# Altium PCB USB2514 PCB v2.PcbDoc
Units mm, origin at the board's own origin, x right, y up, seen from the top; angles counter-clockwise.
Board outline 44 x 44 mm, 2 copper layers (Top Layer, Bottom Layer); 61 components, 47 nets, 205 pads, 143 vias.
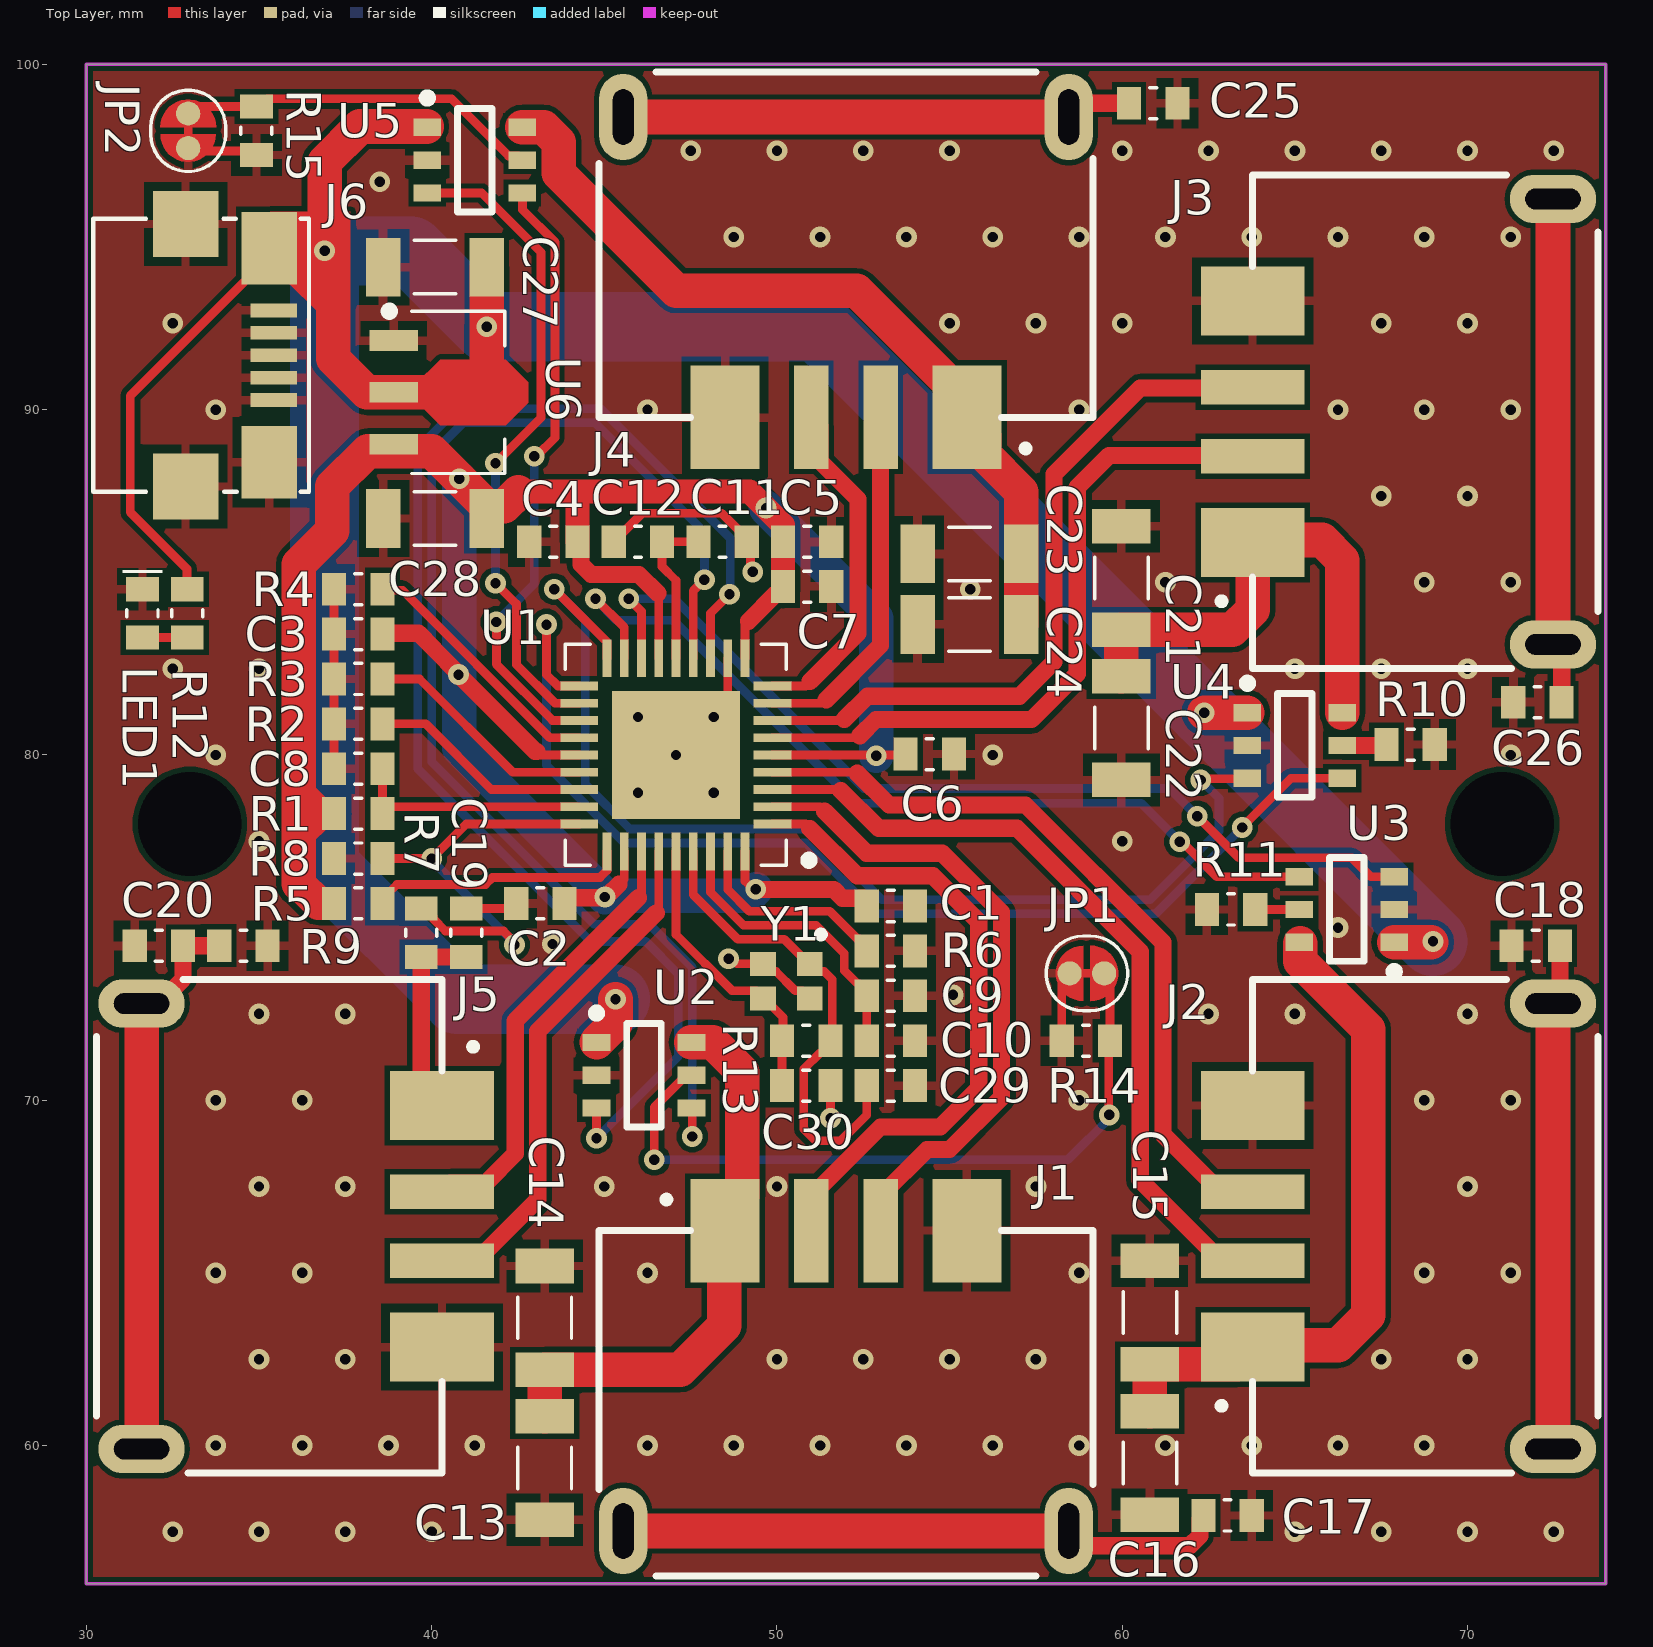
[diagram p0: Top Layer view]
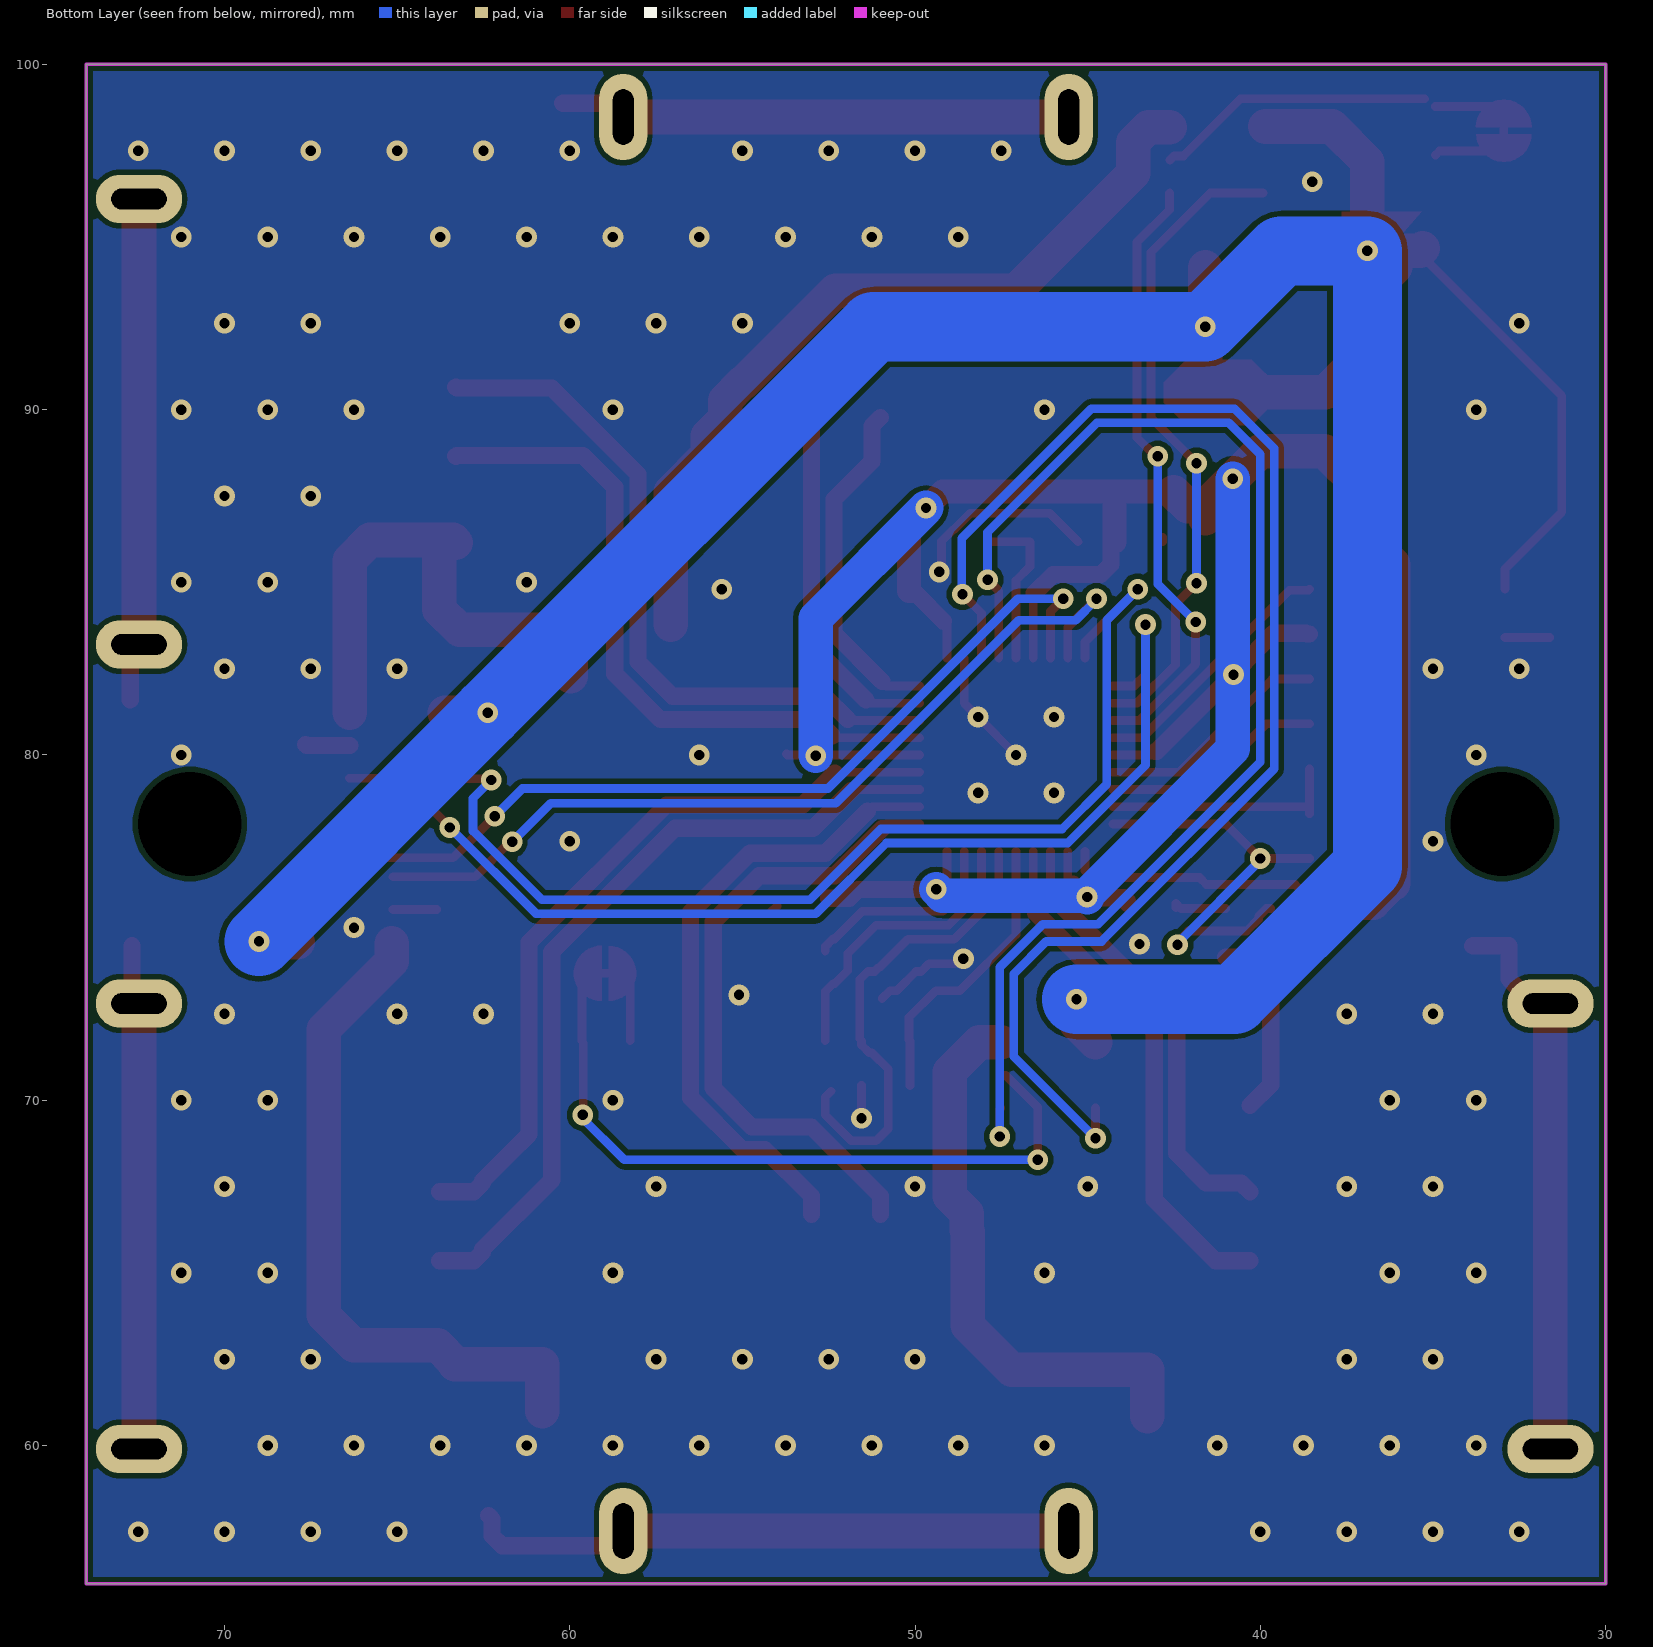
[diagram p1: Bottom Layer view, seen from below]
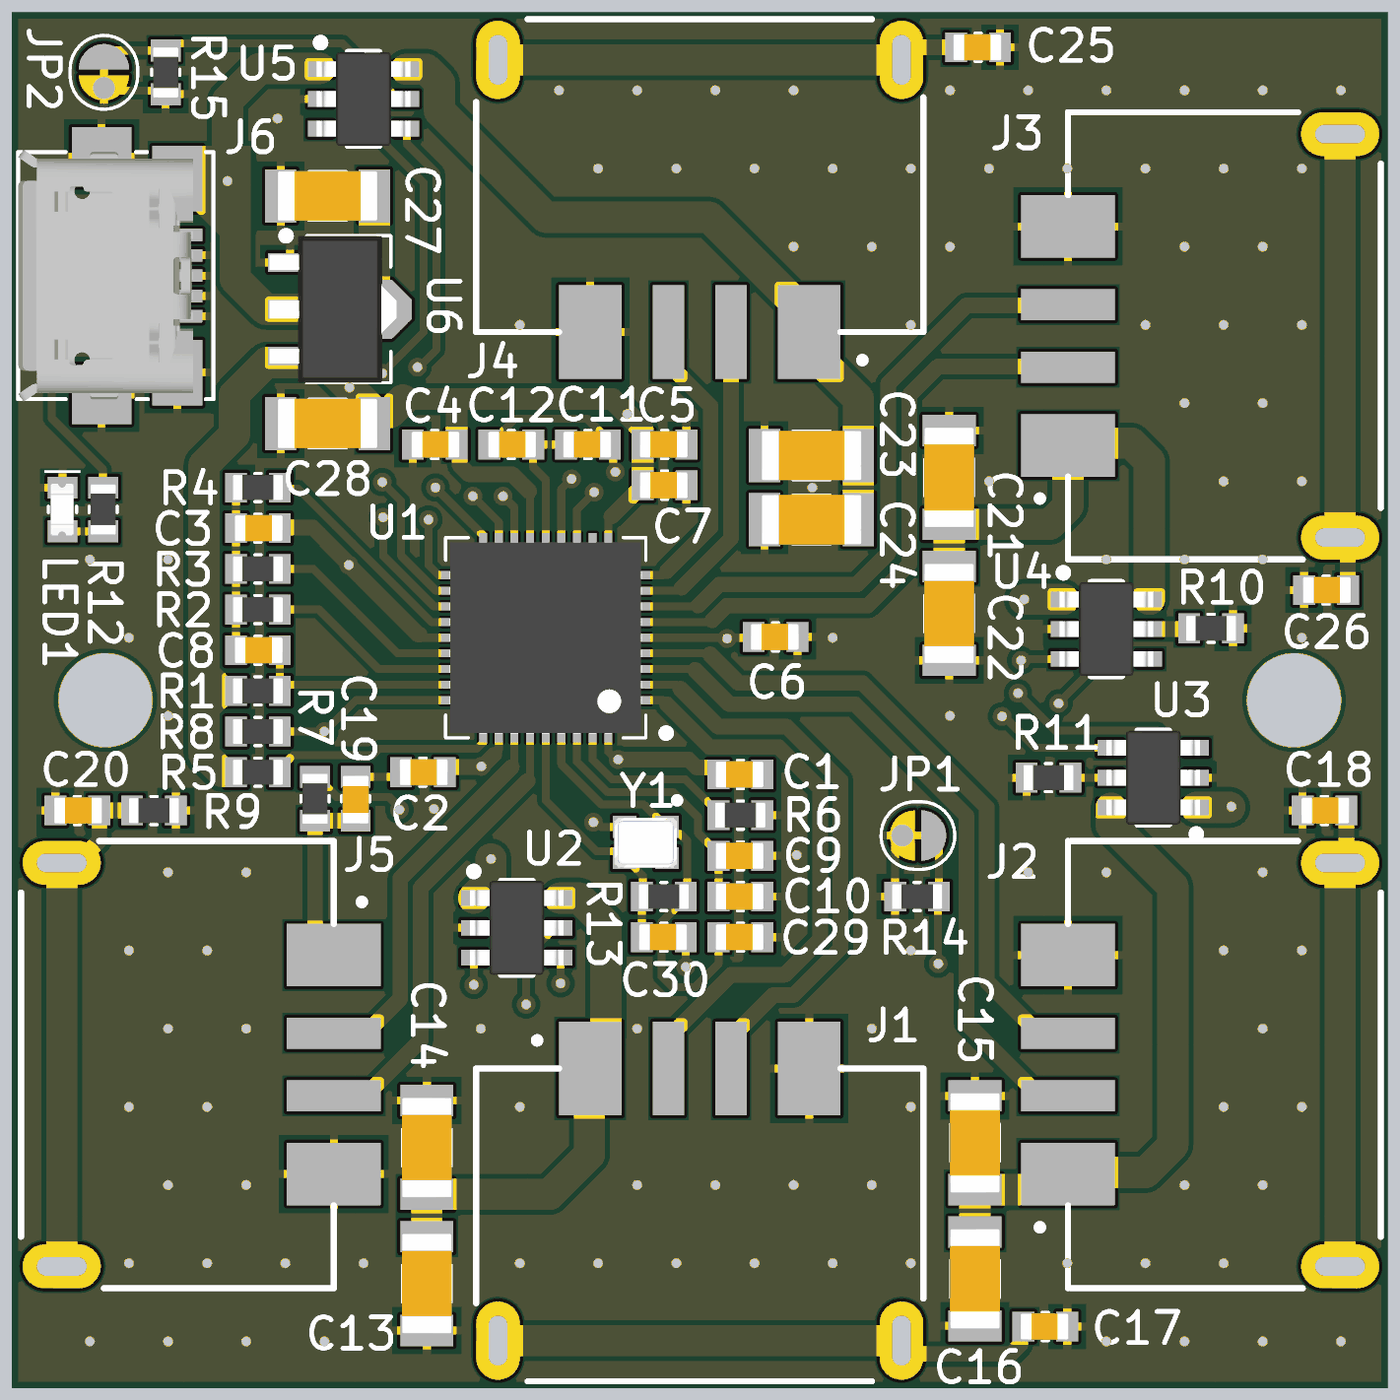
[diagram p2: 3D render of the assembled board from above, using the file's embedded part models]

## Layer stack, top to bottom
Top Solder: solder mask 0.0102, Solder Resist, Dk 3.5
Top Layer: signal copper 0.0356
Dielectric 1: dielectric 0.32, FR-4, Dk 4.8
Bottom Layer: signal copper 0.0356
Bottom Solder: solder mask 0.0102, Solder Resist, Dk 3.5

## Board outline
30,56 30,100 74,100 74,56

## Design rules (kind name [scope] priority, off if disabled: settings)
Clearance "Stitching GND" [IsStitchingVia and InNet('GND') vs (IsVia and (Not IsStitchingVia)) Or IsPad] p1: gap=0.127 ignorepadtopadclearanceinfootprint=FALSE
Clearance [All] p2: gap=0.152 ignorepadtopadclearanceinfootprint=FALSE
DiffPairsRouting [All] p1: maxlimit=0.254 minlimit=0.1 mostfreqgap=0.152 toplayer_minwidth=0.1 toplayer_maxwidth=1 toplayer_prefwidth=0.254 bottomlayer_minwidth=0.1 bottomlayer_maxwidth=1 bottomlayer_prefwidth=0.254 maxuncoupledlength=12.7
HoleSize [All] p1: absolutevalues=TRUE maxlimit=5 minlimit=0.025 maxpercent=80.000 minpercent=20.000
MinimumSolderMaskSliver [All] p1: minsoldermaskwidth=0
PolygonConnect [All] p1: connectstyle=Relief reliefconductorwidth=0.254 reliefentries=4 polygonreliefangle="90 Angle" airgapwidth=0.254
RoutingVias [All] p1: holewidth=0.3 width=0.6 viastyle="Through Hole" minholewidth=0.1 minwidth=0.1 maxholewidth=5 maxwidth=5
ShortCircuit [All] p1: allowed=TRUE
SilkToSilkClearance [All] p1: silktosilkclearance=0.1
SilkToSolderMaskClearance [IsPad] p1: minsilkscreentomaskgap=0 clearancetoexposedcopper=TRUE
SolderMaskExpansion [All] p1: expansion=0.102 istentingtop=FALSE
Width [All] p1: maxlimit=3 minlimit=0.254 preferedwidth=0.254 minimp=50.000000 maximp=50.000000 favimp=50.000000
24 further rules are at their usual default settings.

## Classes and differential pairs
component class "USB2514 USB PORTS": C13 C14 C15 C16 C17 C18 C19 C20 C21 C22 C23 C24 C25 C26 J1 J2 J3 J4 J5 R7 R8 R9
component class "USB2514 REGULATOR": C27 C28 J6 LED1 R12 U6
component class "USB2514 POWER DISTRIBUTION SWITCHES": JP1 JP2 R10 R11 R14 R15 U2 U3 U4 U5
component class "USB2514 MCU": C1 C2 C3 C4 C5 C6 C7 C8 C9 C10 C11 C12 R1 R2 R3 R4 R5 R6 U1
component class "USB2514 CRYSTAL": C29 C30 R13 Y1

## Components (designator, comment, footprint, x,y, rotation, side; value= is the part's Value field where it differs from the comment)
C1 "0.1uF" CAPC1608X06N-0603 53.3,75.625 r180 top
C2 "0.1uF" CAPC1608X06N-0603 43.15,75.7 r0 top
C3 "0.1uF" CAPC1608X06N-0603 37.875,83.5 r0 top
C4 "0.1uF" CAPC1608X06N-0603 43.525,86.175 r0 top
C5 "0.1uF" CAPC1608X06N-0603 50.875,86.175 r180 top
C6 "0.1uF" CAPC1608X06N-0603 54.425,80.025 r180 top
C7 "4.7uF 6.3V X5R" CAPC1608X06N-0603 50.875,84.875 r180 top
C8 "0.1uF" CAPC1608X06N-0603 37.875,79.6 r0 top
C9 "0.1uF" CAPC1608X06N-0603 53.3,73.025 r180 top
C10 "1uF 16V X5R" CAPC1608X06N-0603 53.3,71.725 r180 top
C11 "0.1uF" CAPC1608X06N-0603 48.425,86.175 r180 top
C12 "1uF 16V X5R" CAPC1608X06N-0603 45.975,86.175 r0 top
C13 "22uF" CAPC3216X10N-1206 43.275,59.35 r90 top
C14 "22uF" CAPC3216X10N-1206 43.275,63.7 r270 top
C15 "22uF" CAPC3216X10N-1206 60.8,63.85 r270 top
C16 "22uF" CAPC3216X10N-1206 60.8,59.5 r90 top
C17 "0.1uF" CAPC1608X06N-0603 63.05,57.975 r180 top
C18 "0.1uF" CAPC1608X06N-0603 71.975,74.475 r0 top
C19 "1uF 16V X5R" CAPC1608X06N-0603 41,74.85 r270 top
C20 "0.1uF" CAPC1608X06N-0603 32.1,74.475 r0 top
C21 "22uF" CAPC3216X10N-1206 59.975,85.125 r270 top
C22 "22uF" CAPC3216X10N-1206 59.975,80.775 r90 top
C23 "22uF" CAPC3216X10N-1206 55.575,85.825 r0 top
C24 "22uF" CAPC3216X10N-1206 55.575,83.775 r0 top
C25 "0.1uF" CAPC1608X06N-0603 60.9,98.875 r180 top
C26 "0.1uF" CAPC1608X06N-0603 72.025,81.525 r0 top
C27 "10uF" CAPC3216X10N-1206 40.1,94.125 r0 top
C28 "10uF" CAPC3216X10N-1206 40.1,86.85 r0 top
C29 "33pF" CAPC1608X06N-0603 53.3,70.425 r180 top
C30 "33pF" CAPC1608X06N-0603 50.85,70.425 r180 top
J1 "USB-A CONNECTOR" USB-U-A-24DS-Y-1 48.5,66.225 r0 top
J2 "USB-A CONNECTOR" USB-U-A-24DS-Y-1 63.775,62.85 r90 top
J3 "USB-A CONNECTOR" USB-U-A-24DS-Y-1 63.775,86.15 r90 top
J4 "USB-A CONNECTOR" USB-U-A-24DS-Y-1 55.5,89.775 r180 top
J5 "USB-A CONNECTOR" USB-U-A-24DS-Y-1 40.3,69.85 r270 top
J6 "MICRO USB2.0" USB_CON_10118192-0001LF_SMD 34.15,91.575 r270 top
JP1 "JUMP_N-C" "JUMP_N-C 0,254" 58.875,73.675 r0 top
JP2 "JUMP_N-C" "JUMP_N-C 0,254" 32.95,97.975 r90 top
LED1 "LED RED" LED_0603 31.625,83.4 r90 top
R1 "100K" RESC1608X06N-0603 37.875,78.3 r180 top
R2 "100K" RESC1608X06N-0603 37.875,80.9 r0 top
R3 "100K" RESC1608X06N-0603 37.875,82.2 r0 top
R4 "100K" RESC1608X06N-0603 37.875,84.8 r0 top
R5 "100K" RESC1608X06N-0603 37.875,75.7 r180 top
R6 "12K" RESC1608X06N-0603 53.3,74.325 r180 top
R7 "100K" RESC1608X06N-0603 39.7,74.85 r270 top
R8 "100K" RESC1608X06N-0603 37.875,77 r0 top
R9 "330" RESC1608X06N-0603 34.55,74.475 r180 top
R10 "390" RESC1608X06N-0603 68.35,80.3 r180 top
R11 "390" RESC1608X06N-0603 63.15,75.525 r0 top
R12 "1K" RESC1608X06N-0603 32.925,84.1 r90 top
R13 "1Meg" RESC1608X06N-0603 50.85,71.725 r180 top
R14 "000" RESC1608X06N-0603 58.95,71.725 r0 top
R15 "000" RESC1608X06N-0603 34.925,98.075 r90 top
U1 "USB2514BT/M2" QFN50P600X600X100_HS-37N 47.075,80 r180 top
U2 "MIC2019A-1YM6 TR" SOT95P280X90-6N 46.15,70.725 r0 top
U3 "MIC2019A-1YM6 TR" SOT95P280X90-6N 66.5,75.525 r180 top
U4 "MIC2019A-1YM6 TR" SOT95P280X90-6N 65,80.275 r0 top
U5 "MIC2019A-1YM6 TR" SOT95P280X90-6N 41.25,97.225 r0 top
U6 "HT7333-1" SOT89-150P350X150-3N 40.5,90.5 r0 top
Y1 "24 MHz 6 pf CRYSTAL" OSC_XRCGB24M000F2P00R0 50.275,73.45 r270 top

## Footprints (in the part's own frame and the unit in brackets; to place one, negate y for a bottom-side part, rotate by r counter-clockwise, add the part's x,y. Pads: shape width x height; smd on the part's side, far side on the other; paste and mask are expansions set on the pad)
CAPC1608X06N-0603 [mm] "Chip Capacitor, 2-Leads, Body 1,55x0,85mm, IPC Medium Density"
  rect 0.7x0.95 smd: 1(-0.7,0) 2(0.7,0)
  silkscreen extent -0.1,-0.45 0.1,0.45, body extent -0.75,-0.42 0.8,0.43, height 0.55
CAPC3216X10N-1206 [mm] "Chip Capacitor, 2-Leads, Body 3,20x1,60mm, IPC Medium Density"
  rect 1x1.7 smd: 1(-1.5,0) 2(1.5,0)
  silkscreen extent -0.6,-0.77 0.6,0.77, body extent -1.6,-0.8 1.6,0.8, height 1
"JUMP_N-C 0,254" [mm]
  round 0.7 smd mask+0: 1(-0.4,0) 2(0.6,0)
  Top Layer region: 0,-0.8 -0.347,-0.721 -0.625,-0.499 -0.78,-0.178 -0.78,0.178 -0.625,0.499 -0.347,0.721 0,0.8 0,0.8
  Top Layer region: 0.2,-0.806 0.2,0.806 0.55,0.726 0.83,0.503 0.986,0.179 0.986,-0.179 0.83,-0.503 0.55,-0.726 0.2,-0.806
  Top Layer lines w0.254: -0.4,0 0.6,0
  silkscreen extent -1.08,-1.08 1.28,1.08
LED_0603 [mm]
  rect 0.7x0.95 smd: A(0,0) C(1.4,0)
  silkscreen extent 0.6,-0.58 1.95,0.58, body extent -0.13,-0.35 1.53,0.38, height 0.68
OSC_XRCGB24M000F2P00R0 [mm]
  rect 0.7x0.75 smd: 1(-0.5,0.675) 2(-0.5,-0.675) 3(0.5,-0.675) 4(0.5,0.675)
  silkscreen extent -1.45,0.9 -1.25,1.1, body extent -0.8,-1 0.8,1, height 0.7
QFN50P600X600X100_HS-37N [mm] "QFN, 36-Leads, Body 6,00x6,00mm, Pitch 0,50mm, Thermal Pad 3,70x3,70mm, IPC Medium Density"
  rect 1.1x0.254 smd mask+0.076: 1(-2.8,2) 2(-2.8,1.5) 3(-2.8,1) 4(-2.8,0.5) 5(-2.8,0) 6(-2.8,-0.5) 7(-2.8,-1) 8(-2.8,-1.5) 9(-2.8,-2) 19(2.8,-2) 20(2.8,-1.5) 21(2.8,-1) 22(2.8,-0.5) 23(2.8,0) 24(2.8,0.5) 25(2.8,1) 26(2.8,1.5) 27(2.8,2)
  rect 0.254x1.1 smd mask+0.076: 10(-2,-2.8) 11(-1.5,-2.8) 12(-1,-2.8) 13(-0.5,-2.8) 14(0,-2.8) 15(0.5,-2.8) 16(1,-2.8) 17(1.5,-2.8) 18(2,-2.8) 28(2,2.8) 29(1.5,2.8) 30(1,2.8) 31(0.5,2.8) 32(0,2.8) 33(-0.5,2.8) 34(-1,2.8) 35(-1.5,2.8) 36(-2,2.8)
  rect 3.7x3.7 smd: 37(0,0)
  silkscreen extent -3.98,-3.2 3.2,3.2, body extent -3.07,-3.07 3.07,3.07, height 1
RESC1608X06N-0603 [mm] "Chip Capacitor, 2-Leads, Body 1,55x0,85mm, IPC Medium Density"
  rect 0.7x0.95 smd: 1(-0.7,0) 2(0.7,0)
  silkscreen extent -0.1,-0.45 0.1,0.45, body extent -0.8,-0.4 0.8,0.4, height 0.8
SOT89-150P350X150-3N [mm] "SOT89, 3-Leads, Body 4,55x2,50mm, Pitch 1,50mm, Lead Span 3,5mm, IPC Medium Density"
  rect 1.4x0.6 smd: 1(-1.6,1.5) 2(-1.6,0) 3(-1.6,-1.5)
  Top Layer region: -1,0.2 -0.25,0.95 1.65,0.95 2.3,0.3 2.3,-0.3 1.65,-0.95 -0.25,-0.95 -1,-0.2
  silkscreen extent -1.85,-2.35 1.62,2.47, body extent -2.25,-2.35 1.8,2.35, height 1.5
SOT95P280X90-6N [mm] "SOT23, 6-Leads, Body 2,90x2,80mm, Pitch 0,95mm, IPC Medium Density"
  rect 0.8x0.5 smd: 1(-1.375,0.95) 2(-1.375,0) 3(-1.375,-0.95) 4(1.375,-0.95) 5(1.375,0) 6(1.375,0.95)
  silkscreen extent -1.5,-1.5 0.5,1.92, body extent -1.5,-1.5 1.5,1.5, height 0.9
USB-U-A-24DS-Y-1 [mm]
  rect 2x3 smd: 1(0,0) 4(7,0)
  rect 1x3 smd: 2(2.5,0) 3(4.5,0)
  oval 1.4x2.5 hole 1.6 slot 0.6 at 0 deg: S(-2.95,-8.7) S(9.95,-8.7)
  silkscreen extent -3.65,-10 10.65,1
USB_CON_10118192-0001LF_SMD [mm] "USB2.0 MICRO"
  rect 0.4x1.35 smd: 1(-1.3,1.275) 2(-0.65,1.275) 3(0,1.275) 4(0.65,1.275) 5(1.3,1.275)
  rect 2.1x1.6 smd: 6(-3.1,1.15) 7(3.1,1.15)
  rect 1.9x1.9 smd: 8(-3.8,-1.275) 9(3.8,-1.275)
  silkscreen extent -3.95,-3.94 3.95,2.3, body extent -4.04,-3.94 4.04,1.66, height 2.81

## Part data
C1 C2 C3 C4 C5 C6 C7 C8 C9 C10 C11 C12 C17 C18 C19 C20 C25 C26 C29 C30: library part CAP_0603_0.1uF
C13 C14 C15 C16 C21 C22 C23 C24 C27 C28: library part CAP_1206_22uF
J1 J2 J3 J4 J5: library part USB-U-A-24DS-Y-1, "USB-A (USB TYPE-A) USB 2.0", Package=None, Availability=Unavailable, MF=Samtec, MP=USB-A-S-X-X-VU, Price=None
J6: library part USB_CON-10118192-0002LF-SMD, "USB - micro B USB 2.0 Receptacle Connector 5 Position Surface Mount, Right Angle", Case/Package=SMD, Manufacturer="Amphenol ICC (FCI)", Manufacturing Part Number=10118192-0002LF, Supplier Part Number-1=609-5379-1-ND, Supplier-1=Digikey
LED1: library part LED_RED_0603
R1 R2 R3 R4 R5 R6: library part RES_0603_10K
R7 R8 R9 R10 R11 R12 R13 R14 R15: library part RES_0603_1K
U1: "USB Hub Controller USB Interface 36-SQFN (6x6)", Package="VFQFN-36 Microchip", Availability=Warning, Check_prices=https://www.snapeda.com/parts/USB2514BT/M2/Microchip/view-part/1051251/?ref=eda, MF=Microchip, MP=USB2514BT/M2, Price=None, Purchase-URL=https://pricing.snapeda.com/search/part/USB2514BT/M2/?ref=eda, SnapEDA_Link=https://www.snapeda.com/parts/USB2514BT/M2/Microchip/view-part/1051251/?ref=snap
U6: "HT7333-1 / 30V, 250mA TinyPowerTM LDO"
Y1: "8 MHz 12.5 pf Osc"

## Free pads (board coordinates)
  round 0 hole 3: ""(33,78) ""(71,78)

## Via types
v1: diameter 0.6, hole 0.3, Top Layer to Bottom Layer, tented both sides, 143 vias

## Nets (pads, with @x,y where several pads share a name; then routed paths per layer and width w, separated by ;. In a path a pad name is that pad's centre, name@x,y a point inside that pad or via, vN(x,y) a via of type N, cw(c..) or ccw(c..) an arc to the next point about the centre after c; other vN are vias at no path point)
3,3V: C1.2 C2.2 C3.2 C4.2 C5.2 C6.2 C7.2 C28.2 R1.2 R5.2 U1.5 U1.10 U1.15 U1.23 U1.29 U1.36 U6.3 | length 85.9
  Top Layer w0.254: 43.147,80 U1.23 ; 45.426,76.255 45.575,76.403 U1.29 ; 46.546,84.65 46.575,84.621 U1.15 ; U1.36 49.075,76.35 v1@49.354,76.071 ; U1.10 49.075,83.775 49.175,83.875 ; U1.5 53.7,80 C6.2
  Top Layer w0.5: C3.2 38.65,83.5 38.675,83.525 39.622,83.525 40.053,83.094 40.053,83.08 40.779,82.354 v1(40.779,82.327) ; v1@40.798,82.348 40.798,82.308 43.004,80.102 43.045,80.102 ; C2.2 43.85,75.767 43.95,75.867 44.999,75.867 v1(45.019,75.886) ; C4.2 44.325,86.075 44.325,85.518 44.618,85.225 46,85.225 46.546,84.679 ; v1@45.03,75.898 45.057,75.898 45.107,75.948 45.119,75.948 45.426,76.255 ; 49.175,83.875 49.95,84.65 50.075,84.65 C7.2@50.175,84.75 ; v1(49.389,76.106) 51.644,76.106 51.9,75.85 C1.2@52.5,75.85
  Top Layer w0.7: 42.503,87.6 42.532,87.629 44.2,87.629 ; C4.2 44.225,87.604 44.2,87.629 ; C7.2@50.175,84.75 C7.2 C5.2 50.175,86.66 49.206,87.629 44.2,87.629
  Top Layer w0.95: 36.125,78.9 36.151,78.874 36.702,78.323 ; 36.151,76.277 36.728,75.7 R5.2@36.95,75.7 ; 36.151,77.723 36.728,78.3 R1.2@37.05,78.3
  Top Layer w1: 36.151,76.277 36.151,77.723 36.151,78.874 36.151,85.523 37.125,86.497 37.125,87.775 38.15,88.8 38.7,88.8 40,88.8 v1(40.8,88) C28.2@41.6,87.2 ; C28.2 C28.2@41.6,87.2 ; 42.503,87.6 42.103,87.2 C28.2@41.6,87.2
  Bottom Layer w1: v1@40.8,82.306 40.8,80.175 45.019,75.956 v1(45.019,75.886) ; v1@40.8,82.35 v1(40.8,88) ; v1@45.05,75.925 49.208,75.925 v1(49.389,76.106) ; v1(49.683,87.152) 52.875,83.96 v1(52.875,79.975)
+5: C27.2 J6.6 R12.2 U2.1 U3.1 U4.1 U5.1 U6.2 | length 101.2
  Top Layer w0.254: R12.2 32.918,84.807 32.918,85.382 31.275,87.025 31.275,90.4 35.3,94.425 J6.6
  Top Layer w0.5: v1@68.948,74.575 68.973,74.6 v1(69,74.6)
  Top Layer w1: J6.6 35.375,94.6 36.1,94.6 v1(36.9,94.6) 36.9,97.175 37.925,98.2 U5.1@39.857,98.2 ; J6.6@36.1,94.125 37.15,93.075 37.15,91.475 38.125,90.5 U6.2 41.025,90.5 41.1,90.425 ; v1(41.6,92.4) C27.2 ; 41.7,90.35 41.7,90.425 ; U2.1 45.325,72.225 v1(45.325,72.925) ; v1(62.375,81.225) U4.1 ; U3.1 v1@68.948,74.575
  Bottom Layer w2: v1(45.325,72.925) 40.75,72.925 36.9,76.775 v1(36.9,94.6) 39.4,94.6 v1(41.6,92.4) 51.2,92.4 v1(62.375,81.225) v1(69,74.6)
GND: C1.1 C2.1 C3.1 C4.1 C5.1 C6.1 C7.1 C8.1 C9.1 C10.1 C11.1 C12.1 C13.1 C14.1 C15.1 C16.1 C17.1 C18.1 C19.1 C20.1 C21.1 C22.1 C23.1 C24.1 C25.1 C26.1 C27.1 C28.1 C29.1 C30.1 J1.4 J2.4 J3.4 J4.4 J5.4 J6.1 J6.2 J6.3 J6.4 J6.5 J6.7 J6.8 J6.9 JP1.1 JP2.1 LED1.C R2.1 R3.1 R4.1 R6.1 R8.1 R9.1 R10.1 R11.1 R14.1 R15.1 U1.11 U1.37 U2.2 U3.2 U4.2 U5.2 U6.1 Y1.2 Y1.4 | length 24.1
  Top Layer w0.254: JP2.1 33.035,97.49 34.81,97.49 R15.1 ; C8.1 R4.1 ; C19.1 42.3,75.55 C2.1 C2.1@42.45,75.575 ; C4.1 C4.1@42.825,86.3 ; C12.1 46.1,87 48.4,87 48.877,86.523 48.902,86.523 49.234,86.191 49.234,85.366 v1(49.3,85.3) ; v1(47.075,80) v1(48.175,81.1) 48.575,81.5 U1.11 ; v1(48.6,74.1) 48.694,74.1 48.844,73.95 Y1.2 49.823,73.727 49.973,73.727 50.5,73.2 50.527,73.173 50.727,73.173 Y1.4 ; v1(51.55,69.475) C30.1 ; C1.1 C1.1@54.175,75.45 ; R14.1 JP1.1@58.25,73.525 ; JP1.1@58.25,73.675 JP1.1@58.312,73.612 ; JP1.1@58.325,73.525 JP1.1
  other v1: 32.5,57.5 35,57.5 37.5,57.5 40,57.5 65,57.5 67.5,57.5 70,57.5 72.5,57.5 33.75,60 36.25,60 38.75,60 41.25,60 46.25,60 48.75,60 51.25,60 53.75,60 56.25,60 58.75,60 61.25,60 63.75,60 66.25,60 68.75,60 35,62.5 37.5,62.5 50,62.5 52.5,62.5 55,62.5 57.5,62.5 67.5,62.5 70,62.5 33.75,65 36.25,65 46.25,65 58.75,65 68.75,65 71.25,65 35,67.5 37.5,67.5 45,67.5 50,67.5 57.5,67.5 70,67.5 33.75,70 36.25,70 58.75,70 68.75,70 71.25,70 35,72.5 37.5,72.5 62.5,72.5 65,72.5 70,72.5 55.1,73.05 43.5,74.525 66.25,75 35,77.5 60,77.5 45.975,78.9 48.175,78.9 33.75,80 56.25,80 71.25,80 45.975,81.1 32.5,82.5 35,82.5 65,82.5 67.5,82.5 70,82.5 55.6,84.8 61.25,85 68.75,85 71.25,85 67.5,87.5 70,87.5 33.75,90 46.25,90 58.75,90 66.25,90 68.75,90 71.25,90 32.5,92.5 55,92.5 57.5,92.5 60,92.5 67.5,92.5 70,92.5 48.75,95 51.25,95 53.75,95 56.25,95 58.75,95 61.25,95 63.75,95 66.25,95 68.75,95 71.25,95 38.5,96.6 47.5,97.5 50,97.5 52.5,97.5 55,97.5 60,97.5 62.5,97.5 65,97.5 67.5,97.5 70,97.5 72.5,97.5
NetC8_2: C8.2 R1.1 U1.26 | length 7
  Top Layer w0.254: R1.1 C8.2 ; R1.1@38.575,78.575 38.65,78.5 U1.26
NetC9_2: C9.2 C10.2 U1.34 | length 8.6
  Top Layer w0.254: U1.34 48.075,76.028 49.034,75.069 51.131,75.069 51.95,74.25 51.95,73.755 52.332,73.373 52.377,73.373 52.6,73.15 C9.2 C10.2
NetC11_2: C11.2 C12.2 U1.14 | length 4.6
  Top Layer w0.254: U1.14 47.075,85.05 46.675,85.45 C12.2 C11.2
NetC17_2: C17.2 J1.S | length 17.6
  Top Layer w0.5: J1.S@58.45,57.525 58.45,57.514 58.866,57.098 61.957,57.098 62.25,57.391 62.25,57.875 C17.2
  Top Layer w1: J1.S@45.55,57.525 J1.S@58.45,57.525
NetC18_2: C18.2 J2.S | length 15.3
  Top Layer w0.5: J2.S@72,72.5 72.213,72.5 72.675,72.962 C18.2
  Top Layer w1: J2.S@72.475,59.9 J2.S@72.475,72.8
NetC19_2: C19.2 J5.1 R7.2 | length 5.8
  Top Layer w0.5: J5.1 39.7,70.45 R7.2 C19.2
NetC20_2: C20.2 J5.S R9.2 | length 16.4
  Top Layer w0.5: J5.S@31.6,72.8 32.091,72.8 32.8,73.509 C20.2 R9.2
  Top Layer w1: J5.S@31.6,59.9 31.6,72.5 J5.S@31.6,72.8
NetC25_2: C25.2 J4.S | length 14.8
  Top Layer w0.5: J4.S@58.45,98.475 58.85,98.875 C25.2
  Top Layer w1: J4.S@45.55,98.475 J4.S@58.45,98.475
NetC26_2: C26.2 J3.S | length 15.3
  Top Layer w0.5: J3.S@72.325,83.5 72.588,83.5 72.887,83.201 J3.S@73.05,83.038 ; C26.2@72.725,81.6 J3.S@72.725,83.038
  Top Layer w1: J3.S@72.475,83.2 J3.S@72.475,96.1
NetJP1_2: JP1.2 R14.2 U2.5 | length 20.9
  Top Layer w0.254: v1(46.45,68.275) 46.45,69.8 47.375,70.725 U2.5 ; JP1.2@59.4,73.675 59.645,73.43 59.645,71.73 R14.2 ; R14.2@59.612,71.65 59.612,69.587 v1(59.625,69.575)
  Bottom Layer w0.254: v1(46.45,68.275) 58.425,68.275 v1@59.675,69.525
NetJP2_2: JP2.2 R15.2 U5.5 | length 10.2
  Top Layer w0.254: JP2.2 33.15,98.775 R15.2 ; R15.2@35.25,99 40.575,99 42.227,97.348 42.502,97.348 U5.5
NetLED1_A: LED1.A R12.1 | length 1.3
  Top Layer w0.254: LED1.A R12.1
NetR2_2: R2.2 U1.25 | length 6.5
  Top Layer w0.254: R2.2 39.825,80.9 41.725,79 U1.25
NetR3_2: R3.2 U1.24 | length 6.8
  Top Layer w0.254: R3.2 39.65,82.2 42.35,79.5 U1.24
NetR4_2: R4.2 U1.22 | length 7.5
  Top Layer w0.254: R4.2 38.607,84.768 39.157,84.768 43.425,80.5 U1.22
NetR5_1: R5.1 U1.28 | length 7.4
  Top Layer w0.254: R5.1@38.575,75.825 38.996,76.246 41.558,76.246 41.767,76.454 44.877,76.454 45.075,76.652 U1.28
NetR6_2: R6.2 U1.35 | length 5.9
  Top Layer w0.254: U1.35 48.575,76.102 49.202,75.475 51.527,75.475 52.329,74.673 52.377,74.673 52.6,74.45 R6.2
NetR10_2: R10.2 U4.5 | length 1.5
  Top Layer w0.254: U4.5@66.525,80.275 U4.5@66.648,80.152
  Top Layer w0.5: U4.5 66.525,80.275 67.625,80.275 R10.2
NetR11_2: R11.2 U3.5 | length 1.3
  Top Layer w0.254: R11.2 U3.5
OCS_N1: U1.13 U2.4 | length 38
  Top Layer w0.254: U2.4 47.55,69.75 v1(47.55,68.95) ; U1.13 47.575,84.753 47.897,85.075 v1(47.9,85.075)
  Bottom Layer w0.254: v1(47.55,68.95) 47.55,73.85 46.3,75.1 44.7,75.1 40.006,79.794 40.006,88.707 40.918,89.619 44.732,89.619 47.9,86.451 v1(47.9,85.075)
OCS_N2: U1.17 U3.4 | length 25.8
  Top Layer w0.254: v1(44.746,84.523) 45.575,83.694 U1.17 ; v1(61.666,77.484) 61.731,77.484 62.74,76.475 U3.4
  Bottom Layer w0.254: v1(44.746,84.523) 44.746,84.502 45.348,83.9 47,83.9 52.3,78.6 60.55,78.6 v1(61.666,77.484)
OCS_N3: U1.19 U4.4 | length 33.1
  Top Layer w0.254: v1(43.325,83.775) 43.325,82.324 43.649,82 U1.19 ; v1(63.475,77.9) 63.475,77.915 64.885,79.325 U4.4
  Bottom Layer w0.254: v1(43.325,83.775) 43.325,79.7 45.575,77.45 50.826,77.45 52.876,75.4 60.975,75.4 v1(63.475,77.9)
OCS_N4: U1.21 U5.4 | length 17.9
  Top Layer w0.254: v1(41.875,83.85) 41.875,82.626 43.501,81 U1.21 ; U5.4 42.632,96.268 42.632,95.793 43.575,94.85 43.575,89.193 43.032,88.65 v1(42.975,88.65)
  Bottom Layer w0.254: v1(41.875,83.85) 42.975,84.95 v1(42.975,88.65)
PRTPWR1: U1.12 U2.3 | length 40.7
  Top Layer w0.254: v1(44.775,68.9) U2.3 ; U1.12 48.075,84.1 v1(48.625,84.65)
  Bottom Layer w0.254: v1(44.775,68.9) 47.144,71.269 47.144,73.656 46.2,74.6 44.6,74.6 39.6,79.6 39.6,88.875 40.75,90.025 44.9,90.025 48.65,86.275 48.65,84.675 v1(48.625,84.65)
PRTPWR2: U1.16 U3.3 | length 27.4
  Top Layer w0.254: v1(45.709,84.523) 46.075,84.157 U1.16 ; v1(62.175,78.225) 63.375,77.025 66.65,77.025 67.2,76.475 U3.3
  Bottom Layer w0.254: v1(45.709,84.523) 47.027,84.523 52.525,79.025 61.375,79.025 v1(62.175,78.225)
PRTPWR3: U1.18 U4.3 | length 32.3
  Top Layer w0.254: v1(43.55,84.8) 45.075,83.275 U1.18 ; v1(62.273,79.273) 62.312,79.312 63.613,79.312 U4.3
  Bottom Layer w0.254: v1(43.55,84.8) 44.45,83.9 44.45,79.149 45.743,77.856 50.994,77.856 53.044,75.806 60.806,75.806 62.8,77.8 62.8,78.747 v1(62.273,79.273)
PRTPWR4: U1.20 U5.3 | length 19
  Top Layer w0.254: U5.3@39.924,96.275 41.45,96.275 41.863,95.862 43.169,94.556 43.169,89.769 v1(41.85,88.45) ; v1(41.85,84.975) 42.454,84.371 42.454,82.621 43.575,81.5 U1.20
  Bottom Layer w0.254: v1(41.85,84.975) v1(41.85,88.45)
PWR1: C13.2 C14.2 J1.1 U2.6 | length 16.5
  Top Layer w1: C13.2 C14.2 47.2,62.2 48.475,63.475 48.475,66.2 J1.1 48.5,66.725 49,67.225 49,70.822 48.147,71.675 U2.6
PWR2: C15.2 C16.2 J2.1 U3.6 | length 19.8
  Top Layer w1: C16.2 C15.2 J2.1@63.325,62.35 ; J2.1@63.325,62.4 63.825,62.9 66.25,62.9 67.125,63.775 67.125,72.05 65.15,74.025 U3.6@65.15,74.55
PWR3: C21.2 C22.2 J3.1 U4.6 | length 15.1
  Top Layer w1: C22.2 C21.2 63.189,83.625 63.775,84.211 J3.1 ; J3.1@63.3,86.15 63.375,86.225 65.789,86.225 66.375,85.639 U4.6
PWR4: C23.2 C24.2 J4.1 U5.6 | length 23.8
  Top Layer w1: U5.6 43.247,98.175 43.677,97.745 43.677,96.848 47.082,93.443 52.307,93.443 54.975,90.775 55,90.775 55.5,90.275 J4.1 ; J4.1@55.5,89.75 56,89.25 56,88.7 57.075,87.625 C24.2
USBDM_DN1: J1.2 U1.1 | length 18.6
  Top Layer w0.254: U1.1 50.825,78 50.954,77.871
  Top Layer w0.5: 50.954,77.871 52.323,76.502 52.532,76.502 54.517,76.502 55.848,75.171 55.848,70.345 54.728,69.225 53,69.225 51,67.225 J1.2@51,66.7
USBDM_DN2: J2.2 U1.3 | length 23.5
  Top Layer w0.254: U1.3 51.85,79
  Top Layer w0.5: 51.85,78.971 52.946,77.875 56.953,77.875 60.525,74.303 60.525,67.682 62.525,65.682 62.525,65.6 62.775,65.35 J2.2
USBDM_DN3: J3.2 U1.6 | length 20
  Top Layer w0.254: U1.6 52.343,80.5 52.401,80.558
  Top Layer w0.5: 52.401,80.558 52.402,80.558 52.869,81.025 57.375,81.025 58.7,82.35 58.7,87.75 59.625,88.675 63.275,88.675 J3.2@63.3,88.65
USBDM_DN4: J4.2 U1.8 | length 10.4
  Top Layer w0.254: U1.8 51.325,81.5 51.425,81.6
  Top Layer w0.5: 51.425,81.6 53,83.175 J4.2
USBDM_UP: J5.2 U1.30 | length 12.8
  Top Layer w0.254: 45.988,75.863 46.075,75.95 U1.30
  Top Layer w0.5: J5.2 40.55,67.6 41.565,67.6 42.423,68.458 42.423,72.298 45.988,75.863
USBDP_DN1: J1.3 U1.2 | length 18.5
  Top Layer w0.254: U1.2 51.25,78.5 51.38,78.37
  Top Layer w0.5: 51.38,78.37 52.596,77.154 52.802,77.154 54.787,77.154 56.5,75.441 56.5,70.075 54.998,68.573 54.348,68.573 53,67.225 J1.3@53,66.7
USBDP_DN2: J2.3 U1.4 | length 22.2
  Top Layer w0.254: U1.4 52.329,79.5
  Top Layer w0.5: 52.329,79.471 53.25,78.55 57.2,78.55 61.177,74.573 61.177,69.018 61.747,68.448 62.525,67.67 62.525,67.6 62.775,67.35 J2.3
USBDP_DN3: J3.3 U1.7 | length 20.6
  Top Layer w0.254: U1.7 51.921,81 51.95,81.029
  Top Layer w0.5: 51.95,81.029 52.621,81.7 57.025,81.7 58.025,82.7 58.025,88.125 60.525,90.625 63.275,90.625 J3.3@63.3,90.65
USBDP_DN4: J4.3 U1.9 | length 9.9
  Top Layer w0.254: U1.9 50.825,82 50.96,82.135
  Top Layer w0.5: 50.96,82.135 52.348,83.523 52.348,87.402 51.25,88.5 51.25,89.525 J4.3
USBDP_UP: J5.3 U1.31 | length 15
  Top Layer w0.254: 46.525,75.425 46.575,75.475 U1.31
  Top Layer w0.5: J5.3 41.3,65.35 43.075,67.125 43.075,71.998 46.502,75.425
VBUS_DET: R7.1 R8.2 U1.27 | length 12.8
  Top Layer w0.254: R8.2 v1(40,77) 41,78 U1.27 ; R7.1 39.825,75.55 40.048,75.327 40.048,75.252 40.4,74.9 42.078,74.9 42.4,74.578 v1(42.4,74.5)
  Bottom Layer w0.254: v1(40,77) 40,76.95 42.4,74.55 v1(42.4,74.5)
XTALIN: C29.2 R13.1 U1.33 Y1.1 | length 14
  Top Layer w0.254: U1.33 47.575,75.954 48.866,74.663 50.212,74.663 51.037,73.838 51.062,73.838 51.173,73.727 51.373,73.727 51.604,73.496 R13.1@51.604,71.779 ; R13.1 51.55,71.6 51.327,71.377 51.252,71.377 50.779,70.904 50.779,69.171 51.125,68.825 51.852,68.825 52.6,69.573 52.6,70.094 C29.2@52.435,70.26
XTALOUT: C30.2 R13.2 U1.32 Y1.3 | length 8.5
  Top Layer w0.254: U1.32 47.075,74.8 48.702,73.173 49.402,73.173 50.175,72.4 50.175,71.75 R13.2 C30.2

## Polygon pours and split planes (outlines as drawn)
GND on Top Layer "GND_L01_P000" (solid, pour order 0): 30,100 74,100 74,56 30,56
GND on Bottom Layer "GND_L02_P001" (solid, pour order 1): 30,100 74,100 74,56 30,56

## Keep-outs
Keep-Out Layer:
  the board outline again, w0.1

## Other copper
Top Layer:
  rectangle net +5: 41.1,91.15 42.1,92.45
  region net +5: 35.325,95.725 37.65,95.725 37.65,93.1